# Altium PCB IMX6.PcbDoc (part 2 of 3)
Units mil, origin at the board's own origin, x right, y up, seen from the top; angles counter-clockwise.
Board outline 7950 x 5550 mil, 4 copper layers (Top Layer, GND, VCC, Bottom Layer), stack 30.634 mil thick; 256 components, 328 nets, 1056 pads, 386 vias.
Unrouted connection lines stored in the file: 1.
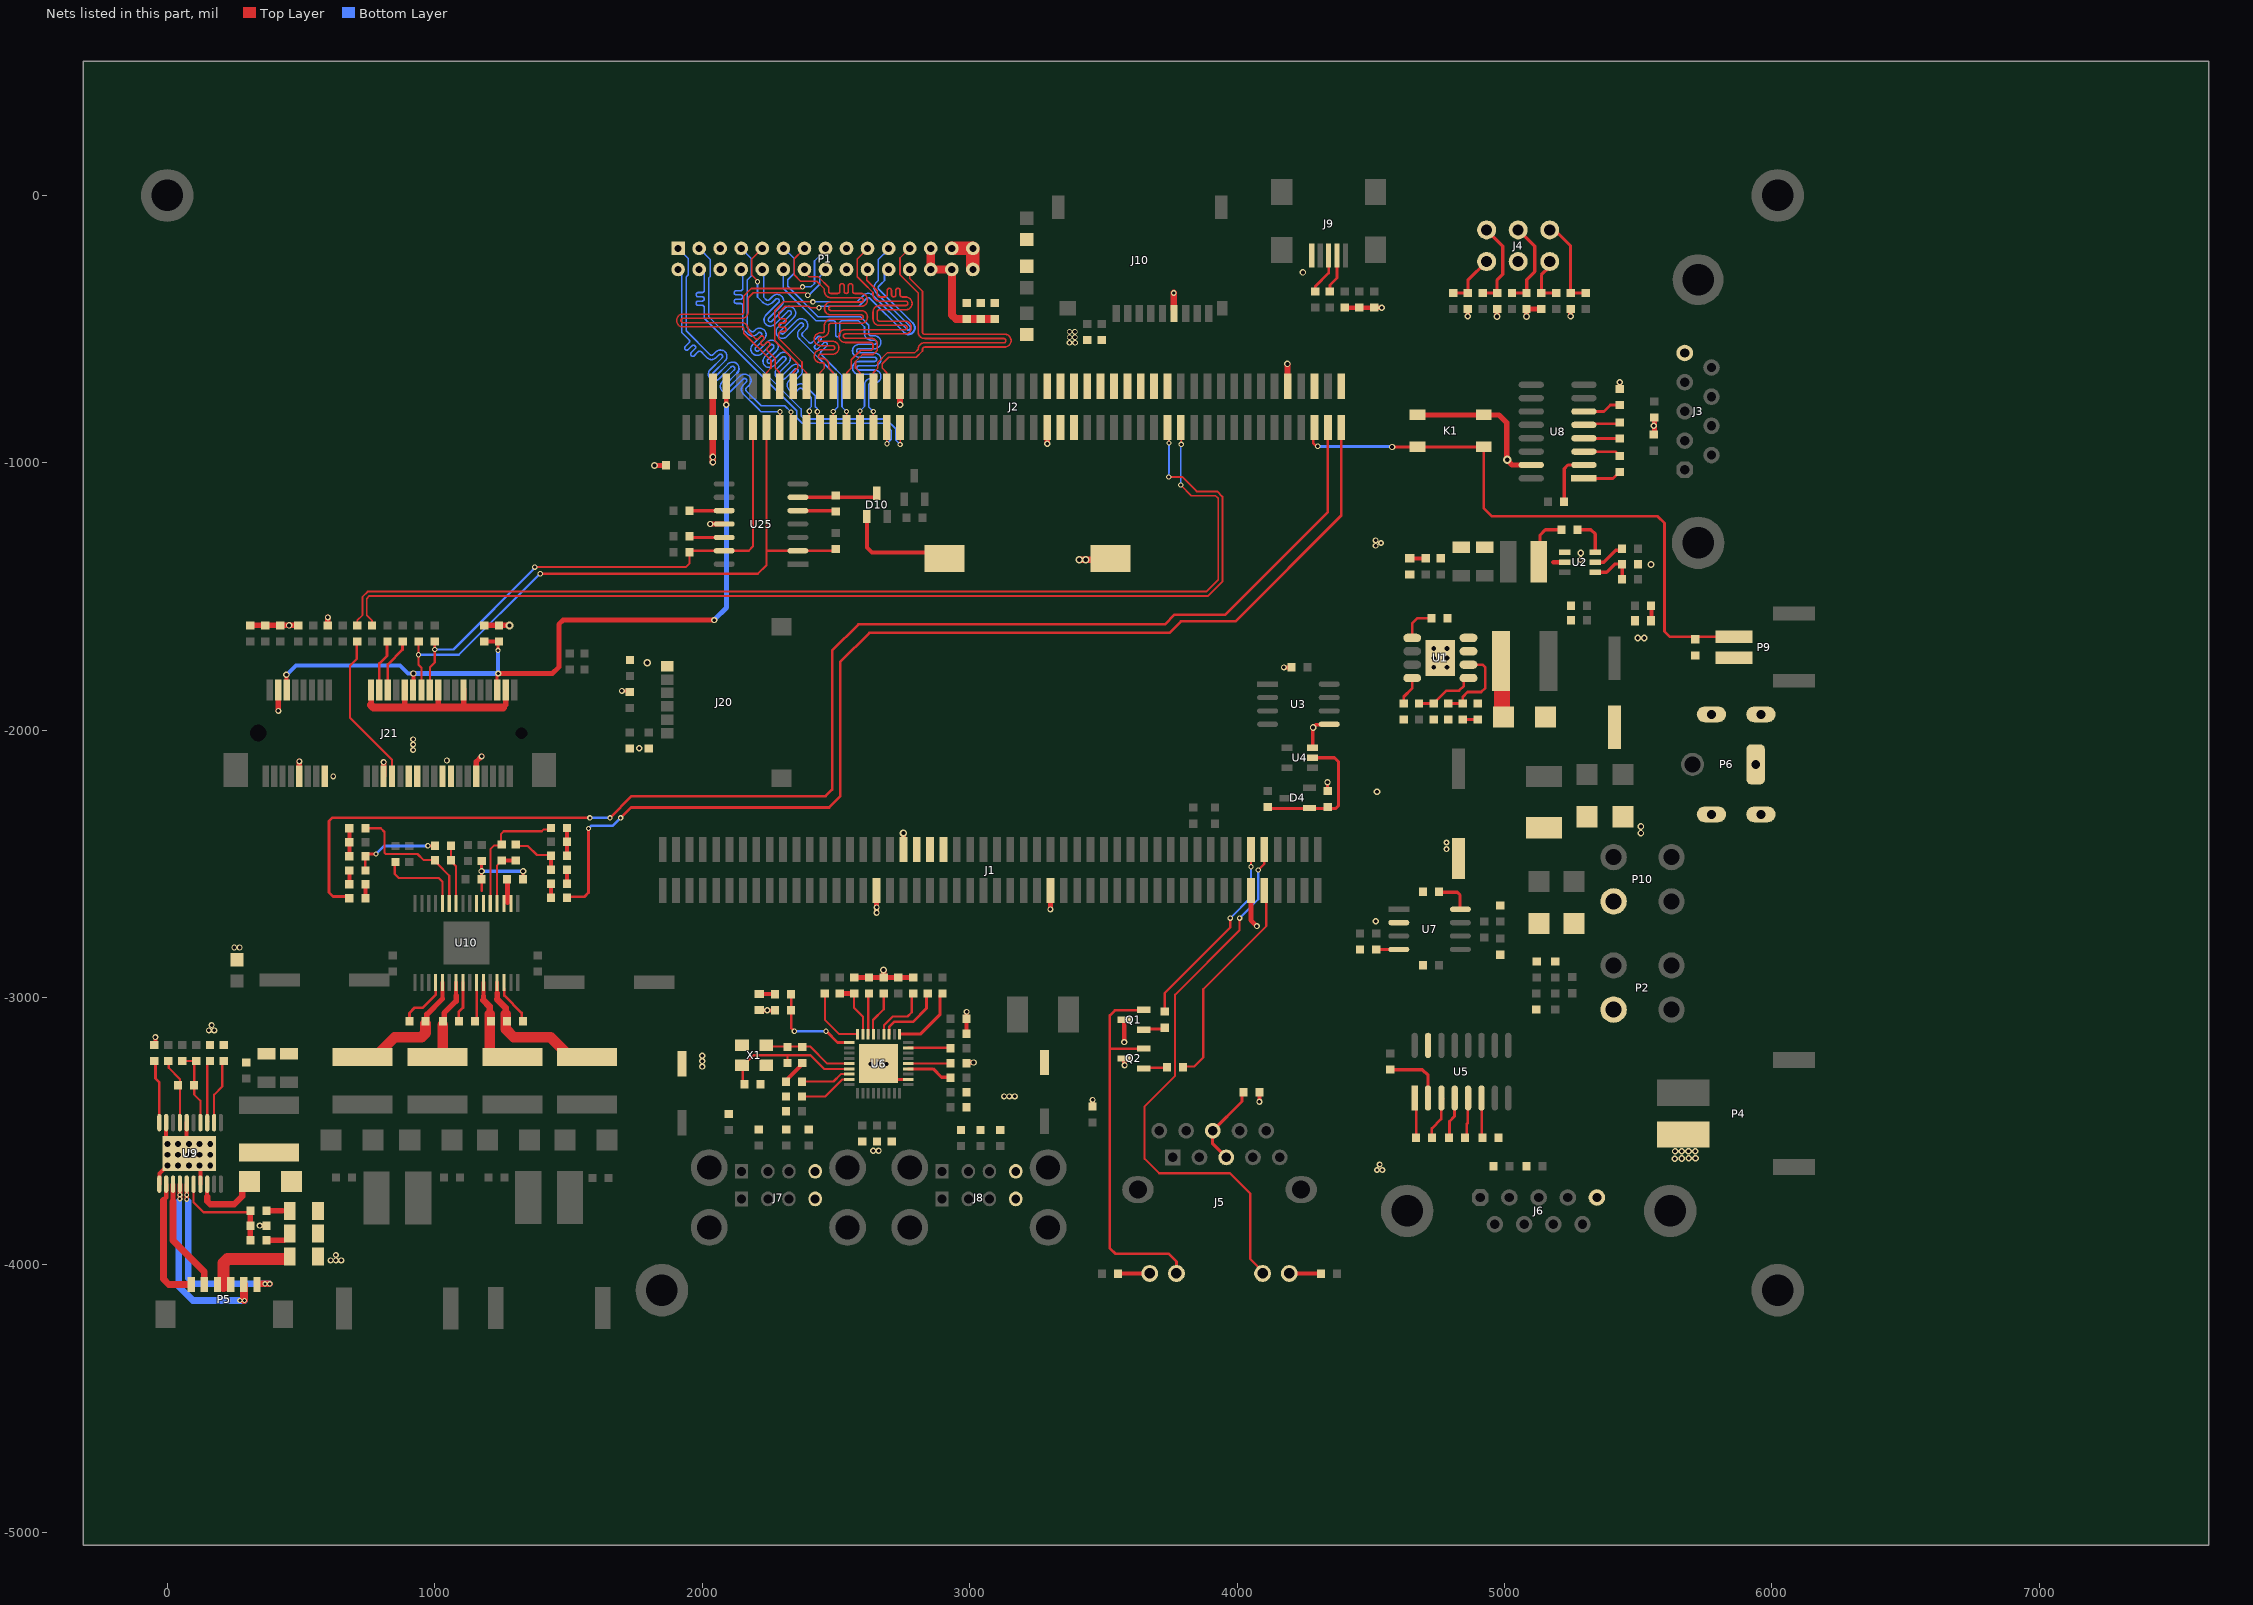
[diagram p4: the nets of this part, all layers, seen from the top]

## Via types
v1: diameter 20, hole 12, Top Layer to Bottom Layer, 137 vias
v2: diameter 22, hole 14, Top Layer to Bottom Layer, 44 vias
v3: diameter 23, hole 13, Top Layer to Bottom Layer, 35 vias
v4: diameter 24, hole 14, Top Layer to Bottom Layer, 34 vias
v5: diameter 25, hole 14, Top Layer to Bottom Layer, 26 vias
v6: diameter 22, hole 13, Top Layer to Bottom Layer, 22 vias
v7: diameter 22, hole 12, Top Layer to Bottom Layer, 19 vias
v8: diameter 30, hole 22, Top Layer to Bottom Layer, tented top, 15 vias
v9: diameter 25, hole 15, Top Layer to Bottom Layer, 11 vias
v10: diameter 22, hole 18, Top Layer to Bottom Layer, 6 vias
v11: diameter 25, hole 16, Top Layer to Bottom Layer, 5 vias
v12: diameter 24, hole 13, Top Layer to Bottom Layer, 5 vias
v13: diameter 20, hole 15, Top Layer to Bottom Layer, 5 vias
v14: diameter 26, hole 15, Top Layer to Bottom Layer, 4 vias
v15: diameter 18, hole 10, Top Layer to Bottom Layer, 4 vias
v16: diameter 20, hole 14, Top Layer to Bottom Layer, 4 vias
v17: diameter 28, hole 16, Top Layer to Bottom Layer, 3 vias
v18: diameter 28, hole 15, Top Layer to Bottom Layer, 2 vias
v19: diameter 30, hole 15, Top Layer to Bottom Layer, 2 vias
v20: diameter 32, hole 16, Top Layer to Bottom Layer, 1 vias
v21: diameter 26, hole 14, Top Layer to Bottom Layer, 1 vias
v22: diameter 30, hole 16, Top Layer to Bottom Layer, 1 vias

## Nets (pads, with @x,y where several pads share a name; then routed paths per layer and width w, separated by ;. In a path a pad name is that pad's centre, name@x,y a point inside that pad or via, vN(x,y) a via of type N, cw(c..) or ccw(c..) an arc to the next point about the centre after c; other vN are vias at no path point) (continued)
GND: BT1.2 C1.2 C2.2 C3.2 C5.2 C8.2 C10.1 C12.2 C13.1 C14.1 C17.2 C18.2 C19.2 C22.1 C23.2 C27.2 C29.2 C30.1 C31.1 C32.1 C34.1 C35.1 C36.2 C37.1 C38.1 C39.1 C40.1 C41.1 C42.1 C43.1 C44.1 C45.1 C46.1 C47.1 C48.1 C49.1 C50.1 C52.2 C53.1 C54.1 C55.2 C57.2 C58.1 C59.1 C60.1 C61.1 C62.1 C64.1 C86.2 C87.2 C88.2 C109.2 C110.2 C111.2 C112.2 C113.2 D1.A D3.K D5.K D6.1 D7.A D8.K D16.1 D17.1 D18.2 D19.2 D20.2 D21.2 D22.2 D23.1 D24.2 D25.1 D26.2 D27.1 D28.2 D29.1 D30.1 D31.2 D32.2 D33.1 D34.1 D35.1 D36.1 D37.1 DW1.A DW2.A J1.33 J1.38 J1.59 J1.89 J2.5 J2.6 J2.34 J2.55 J2.92 J3.5 J4.5 J6.5 J7.4 J7.8 J8.4 J8.8 J9.5 J10.6 J20.1 J21.4 J21.9 J21.15 J21.18 J21.21 J21.26 J21.27 J21.29 J21.34 J21.35 J21.37 J21.40 J21.43 J21.50 K1.1 K1.2 L2.1 L3.1 P1.5 P1.6 P1.17 P1.18 P1.25 P1.26 P1.28 P2.2 P4.2 P6.1 P9.2 P10.2 Q1.3 Q2.3 R1.1 R5.1 R8.1 R12.1 R15.2 R25.2 R26.2 R27.2 R28.1 R30.2 R37.1 R39.1 R43.2 R59.1 R87.1 R88.1 U1.7 U1.9 U2.1 U3.5 U4.3 U5.15 U6.11 U6.37 U7.2 U8.15 U9.6 U9.9 U9.11 U9.17 U9.21 U25.11 X1.2 X1.4 | length 5293.8
  Top Layer w10: C22.1@4338.48,-2227 v4(4338.48,-2195)
  Top Layer w12: v3(1699.48,-1853) 1732.19,-1853 1732.28,-1852.91 D32.2@1728.57,-1852.91 ; U6.37@2718.54,-3306.15 U6.11@2769.72,-3306.15 ; U4.3@4282.71,-2065.6 4283.48,-2064.83 4283.48,-1990 4293.48,-1980 U3.5@4343.48,-1980
  Top Layer w15: R43.2@-45.52,-3178 v3(-45.52,-3148) ; U9.11@-30.83,-3698 -30.83,-3658.32 U9.21@-15.52,-3643 ; U9.21@-5.24,-3528 U9.9@-5.24,-3468 ; U9.21@71.53,-3573.16 U9.6@71.53,-3468 ; U9.17@122.71,-3698 U9.21@122.71,-3624.34 ; v3(344.48,-3853) R37.1@369.48,-3853 ; D5.K@2207.48,-3048 R30.2@2271.48,-3048 ; C45.1@2322.48,-3301 2373.48,-3250 C39.1@2373.48,-3245 ; C35.1@2988.48,-3135 v6(2988.48,-3053) ; v3(4083.48,-3390) C19.2@4083.48,-3355 ; v6(4175.48,-1765) C23.2@4203.48,-1765
  Top Layer w18: v5(1821.48,-1010) C2.2@1869.8,-1010 ; v4(2029.48,-1229) U25.11@2081.89,-1229 ; C31.1@2561.48,-2925 C31.1@2568.48,-2925 R25.2@2623.48,-2925 R26.2@2678.48,-2925 C34.1@2733.48,-2925 R27.2@2785.48,-2925 ; v3(2652,-2683) J1.33@2652,-2580 ; J1.38@2752,-2425.48 v18(2752,-2385) ; C46.1@2984.48,-3243 v4(3014.48,-3243) ; v3(3302,-2670.52) J1.59@3302,-2599.77 ; C37.1@3459.48,-3408 v3(3459.48,-3383) ; v3(3578.06,-3166.58) Q1.3@3578.06,-3083 ; v3(3579.48,-3253) Q2.3@3579.48,-3229.42 ; J1.89@4052,-2599.77 4052,-2710.52 v3(4074.48,-2733) ; C48.1@4402.48,-420 C49.1@4457.48,-420 C47.1@4512.48,-420 v5@4543.48,-420 ; v5(4862.57,-452) D37.1@4862.57,-424.91 ; v5(4972.57,-453) D6.1@4972.57,-424.91 ; v5(5082.57,-453) D35.1@5082.57,-424.91 D36.1@5137.57,-424.91 ; v5(5247.57,-452) D34.1@5247.57,-424.91 ; C55.2@5431.48,-724 v4(5431.48,-699) ; D18.2@5561,-895 D19.2@5561,-836.35
  Top Layer w20: C111.2@308.48,-1608 R87.1@489.48,-1608 ; v3(414.28,-1927.8) J21.4@414.28,-1846.58 ; J21.9@493.02,-2169.42 v6(493.02,-2116.54) ; R88.1@599.48,-1608 v6(599.48,-1578) ; 761.2,-1906.72 J21.18@761.2,-1849.58 ; J21.21@807.98,-2171.5 v6(807.98,-2119.42) ; 887.2,-1918.72 J21.26@887.2,-1858.58 ; 1012.2,-1916.72 J21.34@1012.2,-1856.58 ; 1107.2,-1906.72 J21.40@1107.2,-1846.58 ; J21.43@1154.44,-2169.42 1154.44,-2118.04 v6(1174.48,-2098) ; C112.2@1184.48,-1608 C113.2@1239.48,-1608 v19(1278.48,-1608) ; 1254.48,-1916 1264.48,-1906 J21.50@1264.48,-1846.78 ; R26.2@2678.48,-2925 v14(2678.48,-2897) ; v4(3289.8,-928.51) J2.55@3289.8,-867.49 ; K1.1@4674.46,-820.95 4979.43,-820.95 5008.48,-850 5008.48,-988 5028.57,-1008.09 U8.15@5100.39,-1008.09
  Top Layer w22: v4(2739.8,-782.69) J2.34@2739.8,-713.94 ; v4(4188.48,-630) 4188.48,-712.63 J2.92@4189.8,-713.94
  Top Layer w24: v4(2039.8,-998.31) J2.6@2039.8,-713.94 ; v17(3409.48,-1363) BT1.2@3522.51,-1363
  Top Layer w25: J10.6@3763.48,-425 v7(3763.48,-365)
  Top Layer w30: 761.2,-1906.72 770.48,-1916 1254.48,-1916 ; P1.25@2854.36,-198 P1.26@2854.36,-276.74 P1.28@2933.1,-276.74 2933.1,-446.62 2949.48,-463 C52.2@2989.48,-463 C53.1@3041.48,-463 C54.1@3094.48,-463 ; D7.A@5153.48,-1950 D7.A@5154.22,-1950
  other v2: 249.48,-2813 269.48,-2813 1044.48,-2113
  other v3: 609.48,-3983 629.48,-3983 649.48,-3983 629.48,-3963 2639.48,-3573 2659.48,-3573 3128.48,-3370 3148.48,-3370 3168.48,-3370 1999.48,-3258 1999.48,-3238 1999.48,-3218 154.48,-3123 174.48,-3123 164.48,-3103 2652,-2663
  other v4: 2242.48,-3048 1764.48,-2068 2039.8,-978 4246.48,-288
  other v5: 5637.48,-3603 5663.48,-3602 5689.48,-3601 5715,-3601 5638.48,-3575 5663.48,-3575 5688.48,-3575 5713.48,-3575 4518.48,-2715 4523.48,-2230 4284.48,-1990 5498.48,-1655 5523.48,-1655 5548.48,-1380 5285.48,-1362 5285.48,-1337 5559,-861 4541.48,-420
  other v6: 619.48,-2173
  other v7: 4523.48,-3645 4543.48,-3645 4533.48,-3625 4783.48,-2445 4783.48,-2420 918.48,-2074 918.48,-2054 918.48,-2034 4518.48,-1310 4538.48,-1300 4518.48,-1290 3373.48,-551 3394.48,-551
  other v8: -0.52,-3628 39.48,-3628 79.48,-3628 119.48,-3628 159.48,-3628 -0.52,-3588 39.48,-3588 79.48,-3588 119.48,-3588 159.48,-3588 -0.52,-3548 39.48,-3548 79.48,-3548 119.48,-3548 159.48,-3548
  other v9: 5510,-2385 5510,-2360 454.48,-1608
  other v10: 4735.48,-1765 4785.48,-1765 4735.48,-1730 4785.48,-1730 4735.48,-1695 4785.48,-1695
  other v14: 2629.48,-3248 2689.48,-3248 2659.48,-3247.09
  other v16: 3373.48,-530 3393.48,-530 3373.48,-510 3393.48,-510
  other v17: 1794.48,-1748 3434.48,-1363
  other v20: 5010.48,-989
GPIO3_IO10: J1.44
GPIO3_IO12: J1.42
GPIO3_IO14: J1.40
GVDD: C73.2 R45.1 R49.2 U10.6 U10.7 | length 289
  Top Layer w10: 1174.48,-2600.95 R49.2@1174.48,-2568 ; R49.2@1175.43,-2557.96 R49.2@1175.48,-2559
  Top Layer w12: R49.2@1174.48,-2558 C73.2@1174.48,-2488 ; R45.1@1329.48,-2558 v4(1329.48,-2528)
  Bottom Layer w12: v4(1174.48,-2528) v4(1329.48,-2528)
HDMI_CEC: J2.59
HDMI_CLK_N: J2.72
HDMI_CLK_P: J2.74
HDMI_D0_N: J2.62
HDMI_D0_P: J2.60
HDMI_D1_N: J2.68
HDMI_D1_P: J2.70
HDMI_D2_N: J2.64
HDMI_D2_P: J2.66
HDMI_HPD: J2.57
HDMI_TX_DDC_SCL: J2.58
HDMI_TX_DDC_SDA: J2.56
HPL: C78.1 J2.97 | length 5188.9
  Top Layer w10: C78.1@682.48,-2622 618.48,-2622 603.48,-2607 603.48,-2340 615.48,-2328 v1(1579.48,-2328) ; v1(1654.48,-2328) 1735.48,-2247 2460.48,-2247 2485.48,-2222 2485.48,-1702 2583.48,-1604 3730.48,-1604 3766.48,-1568 3956.48,-1568 4339.8,-1184.69 J2.97@4339.8,-867.49
  Bottom Layer w10: v1(1579.48,-2328) v1(1654.48,-2328)
HPR: C85.1 J2.99 | length 4211.3
  Top Layer w10: C85.1@1495.48,-2623 1559.48,-2623 1574.48,-2608 v1(1574.48,-2368) ; v1(1694.48,-2328) 1733.48,-2289 2474.48,-2289 2516.48,-2247 2516.48,-1744 2624.48,-1636 3747.48,-1636 3790.48,-1593 3993.48,-1593 4389.8,-1196.69 J2.99@4389.8,-905.72
  Bottom Layer w10: v1(1574.48,-2368) 1584.48,-2358 1664.48,-2358 v1(1694.48,-2328)
I2C3_SCL: J2.13 J21.30 R90.2 R112.1 U25.2 | length 2391
  Top Layer w8: R90.2@938.48,-1669 938.48,-1755 949.72,-1766.24 J21.30@949.72,-1846.58 ; v1(1393.48,-1415) 2207.48,-1415 2239.8,-1382.69 J2.13@2239.8,-867.49 ; 2239.8,-1329 R112.1@2493.48,-1329
  Bottom Layer w8: v1(938.48,-1718) 1089.48,-1718 v1@1392.98,-1414.5
I2C3_SDA: J2.11 J21.32 R89.2 R113.1 U25.13 | length 2001.6
  Top Layer w8: J21.32@981.21,-1846.58 981.21,-1765.27 999.48,-1747 R89.2@999.48,-1667 ; v1@1378.48,-1390 1938.48,-1390 1952.48,-1376 R113.1@1952.48,-1334 ; R113.1@1957.48,-1329 U25.13@2081.89,-1329 2173.48,-1329 2189.8,-1312.69 J2.11@2189.8,-867.49
  Bottom Layer w8: v1(999.48,-1698) 1069.48,-1698 v1@1379.48,-1388
  other v1: 1373.48,-1390
LED_ACT: J1.92 J5.13 | length 2092.6
  Top Layer w8: v1(4009.48,-2703) 4009.48,-2748 3768.48,-2989 3768.48,-3293 3654.48,-3407 3654.48,-3603 3708.48,-3657 3973.48,-3657 4049.48,-3733 4049.48,-3978 J5.13@4089.48,-4018 ; v1(4079.48,-2523) 4102,-2500.48 J1.92@4102,-2446.23
  Bottom Layer w8: v1(4009.48,-2703) 4079.48,-2633 v1(4079.48,-2523)
LED_LINK10_100: J1.91 R14.2 | length 818.2
  Top Layer w8: R14.2@3794.48,-3258 3839.48,-3258 3873.48,-3224 3873.48,-2969 4109.48,-2733 4109.48,-2607.25 J1.91@4102,-2599.77
LED_LINK1000: J1.90 R13.2 | length 740.4
  Top Layer w8: R13.2@3729.48,-3053 3729.48,-2983 3974.48,-2738 v1(3974.48,-2703) ; v1(4052,-2510.48) J1.90@4052,-2446.23
  Bottom Layer w8: v1(3974.48,-2703) 4052,-2625.48 v1(4052,-2510.48)
LVDS0_CLK_N: J2.14 P1.15 | length 1285.2
  Top Layer w6: 2183.48,-348.37 2155.48,-376.37 2155.48,-435.69 cw(c2147.48,-435.69) 2147.48,-443.69 1927.84,-443.69 ccw(c1927.84,-467.69) 1927.84,-491.69 2147.48,-491.69 cw(c2147.48,-499.69) 2155.48,-499.69 2155.48,-515 2256.8,-616.31 2256.8,-645.7 2239.8,-662.7 J2.14@2239.8,-713.94 ; 2183.48,-348 2368.48,-348 v1(2374.48,-342)
  Bottom Layer w6: v1(2374.48,-342) 2406.85,-342 2419.48,-329.37 2419.48,-245 P1.15@2458.48,-206
LVDS0_CLK_P: J2.16 P1.16 | length 1267.4
  Top Layer w6: J2.16@2289.8,-713.94 2289.8,-662.7 2272.8,-645.7 2272.8,-609.69 2244.79,-581.69 2243.55,-580.44 cw(c2249.21,-574.78) 2243.55,-569.13 2250.89,-561.79 ccw(c2245.23,-556.13) 2250.89,-550.47 ccw(c2245.23,-556.13) 2239.58,-550.47 2232.24,-557.81 cw(c2226.58,-552.16) 2220.92,-557.81 cw(c2226.58,-552.16) 2220.92,-546.5 2228.26,-539.16 ccw(c2222.61,-533.5) 2228.26,-527.85 ccw(c2222.61,-533.5) 2216.95,-527.85 2209.61,-535.19 cw(c2203.95,-529.53) 2198.29,-535.19 2171.48,-508.37 2171.48,-499.69 ccw(c2147.48,-499.69) 2147.48,-475.69 1927.84,-475.69 cw(c1927.84,-467.69) 1927.84,-459.69 2147.48,-459.69 ccw(c2147.48,-435.69) 2171.48,-435.69 2171.48,-383 2190.11,-364.37 2385.85,-364.37 v1(2394.48,-373)
  Bottom Layer w6: v1(2394.48,-373) 2398.48,-373 2439.48,-332 2439.48,-303.63 P1.16@2445.79,-297.31
LVDS0_TX0_N: J2.30 P1.23 | length 1315.5
  Top Layer w6: J2.30@2639.8,-713.94 2639.8,-662.7 2656.8,-645.7 2656.8,-623.37 2691.17,-589 2793.48,-589 2807.48,-575 cw(c2831.48,-575) 2831.48,-551 ; P1.23@2775.62,-198 2739.48,-234.14 2739.48,-297 2764.31,-321.83 2807.48,-365 2807.48,-511 ccw(c2831.48,-511) 2831.48,-535 3126.98,-535 ; 2832.48,-551 3127.48,-551 ccw(c3127.48,-543) 3135.48,-543 ccw(c3127.48,-543) 3127.48,-535
LVDS0_TX0_P: J2.32 P1.24 | length 1220.3
  Top Layer w6: J2.32@2689.8,-713.94 2689.8,-662.7 2672.8,-645.7 2672.8,-630 2697.8,-605 2800.11,-605 2823.48,-581.63 ; P1.24@2775.62,-276.74 2775.62,-310.51 2823.48,-358.37 2823.48,-511 ccw(c2831.48,-511) 2831.48,-519 3129.98,-519 ; 2823.48,-581 2823.48,-575 cw(c2831.48,-575) 2831.48,-567 3130.98,-567 ccw(c3130.98,-543) 3154.98,-543 ccw(c3130.98,-543) 3130.98,-519
LVDS0_TX1_N: J2.18 P1.21 | length 1288.4
  Top Layer w6: J2.18@2339.8,-713.94 2339.8,-662.7 2356.8,-645.7 2356.8,-629.31 2270.48,-543 2270.48,-431.37 2303.85,-398 2379.48,-398 v1(2413.48,-398)
  Bottom Layer w6: v1(2413.48,-398) 2442.48,-398 2578.85,-398 2603.74,-373.11 cw(c2620.71,-390.08) 2637.68,-373.11 2765.33,-500.76 ; P1.21@2695.48,-203 2657.48,-241 2657.48,-319.37 2648.99,-327.86 ccw(c2665.97,-344.83) 2648.99,-361.8 2776.64,-489.44
  Bottom Layer w8: 2765.33,-500.76 ccw(c2770.98,-495.1) 2776.62,-500.78 ; 2776.64,-500.76 ccw(c2770.98,-495.1) 2778.98,-495.1 ccw(c2770.98,-495.1) 2776.64,-489.44
LVDS0_TX1_P: J2.20 P1.22 | length 1275.4
  Top Layer w6: J2.20@2389.8,-713.94 2389.8,-662.7 2372.8,-645.7 2372.8,-622.69 2286.48,-536.37 2286.48,-517 cw(c2294.48,-517) 2294.48,-509 2305.44,-509 ccw(c2305.44,-501) 2313.44,-501 ccw(c2305.44,-501) 2305.44,-493 2294.48,-493 cw(c2294.48,-485) 2286.48,-485 cw(c2294.48,-485) 2294.48,-477 2305.44,-477 ccw(c2305.44,-469) 2313.44,-469 ccw(c2305.44,-469) 2305.44,-461 2294.48,-461 cw(c2294.48,-453) 2286.48,-453 2286.48,-438 2310.48,-414 2398.37,-414 2404.37,-420 v1(2436.48,-420)
  Bottom Layer w6: v1(2436.48,-420) 2442.48,-414 2585.48,-414 2615.05,-384.43 cw(c2620.71,-390.08) 2626.37,-384.43 2754.01,-512.07 ; P1.22@2681.48,-289 2681.48,-318 2668.79,-330.69 2660.31,-339.17 ccw(c2665.97,-344.83) 2660.31,-350.49 2787.95,-478.13
  Bottom Layer w8: 2754.01,-512.07 ccw(c2770.98,-495.1) 2794.98,-495.1 ccw(c2770.98,-495.1) 2787.95,-478.13
LVDS0_TX2_N: J2.26 P1.19 | length 1333.8
  Top Layer w6: J2.26@2539.8,-713.94 2539.8,-662.7 2556.8,-645.7 2556.8,-614.37 2592.17,-579 2632.48,-579 2638.48,-573 2638.48,-558 ccw(c2630.48,-558) 2630.48,-550 2534.94,-550 cw(c2534.94,-526) 2534.94,-502 2758.02,-502 ccw(c2758.02,-494) 2766.02,-494 ccw(c2758.02,-494) 2758.02,-486 2662.48,-486 cw(c2662.48,-462) 2638.48,-462 2638.48,-435.69 cw(c2662.48,-435.69) 2662.48,-411.69 2760.48,-411.69 ccw(c2760.48,-403.69) 2768.48,-403.69 ccw(c2760.48,-403.69) 2760.48,-395.69 2662.48,-395.69 cw(c2662.48,-371.69) 2638.48,-371.69 2638.48,-363 2603.48,-328 2579.48,-304 2579.48,-238 P1.19@2612.48,-205 ; P1.19@2603.48,-212.66 P1.19@2618.14,-198
LVDS0_TX2_P: J2.28 P1.20 | length 1278.5
  Top Layer w6: J2.28@2589.8,-674 2589.8,-662.7 2572.8,-645.7 2572.8,-621 2598.8,-595 2639.11,-595 2654.48,-579.63 2654.48,-558 ccw(c2630.48,-558) 2630.48,-534 2534.94,-534 cw(c2534.94,-526) 2534.94,-518 2758.02,-518 ccw(c2758.02,-494) 2782.02,-494 ccw(c2758.02,-494) 2758.02,-470 2662.48,-470 cw(c2662.48,-462) 2654.48,-462 2654.48,-435.69 cw(c2662.48,-435.69) 2662.48,-427.69 2760.48,-427.69 ccw(c2760.48,-403.69) 2784.48,-403.69 ccw(c2760.48,-403.69) 2760.48,-379.69 2755.48,-379.69 2747.48,-379.69 cw(c2747.48,-371.69) 2739.48,-371.69 2739.48,-355.28 ccw(c2731.48,-355.28) 2731.48,-347.28 ccw(c2731.48,-355.28) 2723.48,-355.28 2723.48,-371.69 cw(c2715.48,-371.69) 2715.48,-379.69 cw(c2715.48,-371.69) 2707.48,-371.69 2707.48,-355.28 ccw(c2699.48,-355.28) 2699.48,-347.28 ccw(c2699.48,-355.28) 2691.48,-355.28 2691.48,-371.69 cw(c2683.48,-371.69) 2683.48,-379.69 2662.48,-379.69 cw(c2662.48,-371.69) 2654.48,-371.69 2654.48,-356.37 2614.79,-316.69 P1.20@2614.79,-280.09
LVDS0_TX3_N: J2.22 P1.13 | length 1316.7
  Top Layer w6: P1.13@2378.48,-202 2343.48,-237 2343.48,-297 2367.17,-320.69 2398.79,-320.69 2427.54,-320.69 2456.8,-349.94 2456.8,-358.63 ccw(c2480.8,-358.63) 2480.8,-382.63 2593.8,-382.63 cw(c2593.8,-390.63) 2601.8,-390.63 cw(c2593.8,-390.63) 2593.8,-398.63 2480.8,-398.63 ccw(c2480.8,-422.63) 2480.8,-446.63 2593.8,-446.63 cw(c2593.8,-454.63) 2601.8,-454.63 cw(c2593.8,-454.63) 2593.8,-462.63 2480.8,-462.63 ccw(c2480.8,-486.63) 2456.8,-486.63 2456.8,-505.7 cw(c2448.8,-505.7) 2448.8,-513.7 2442.32,-513.7 ccw(c2442.32,-537.7) 2442.32,-561.7 2487.27,-561.7 cw(c2487.27,-569.7) 2495.27,-569.7 cw(c2487.27,-569.7) 2487.27,-577.7 2442.32,-577.7 ccw(c2442.32,-601.7) 2442.32,-625.7 2448.8,-625.7 cw(c2448.8,-633.7) 2456.8,-633.7 2456.8,-645.7 2439.8,-662.7 J2.22@2439.8,-713.94
LVDS0_TX3_P: J2.24 P1.14 | length 1304.6
  Top Layer w6: P1.14@2387.79,-293.69 2398.79,-304.69 2434.17,-304.69 2472.8,-343.31 2472.8,-358.63 ccw(c2480.8,-358.63) 2480.8,-366.63 2506.48,-366.63 ccw(c2506.48,-358.63) 2514.48,-358.63 2514.48,-337.65 cw(c2522.48,-337.65) 2522.48,-329.65 cw(c2522.48,-337.65) 2530.48,-337.65 2530.48,-358.63 ccw(c2538.48,-358.63) 2538.48,-366.63 ccw(c2538.48,-358.63) 2546.48,-358.63 2546.48,-337.65 cw(c2554.48,-337.65) 2554.48,-329.65 cw(c2554.48,-337.65) 2562.48,-337.65 2562.48,-358.63 ccw(c2570.48,-358.63) 2570.48,-366.63 2578.48,-366.63 2579.48,-366.63 2593.8,-366.63 cw(c2593.8,-390.63) 2617.8,-390.63 cw(c2593.8,-390.63) 2593.8,-414.63 2480.8,-414.63 ccw(c2480.8,-422.63) 2480.8,-430.63 2593.8,-430.63 cw(c2593.8,-454.63) 2617.8,-454.63 cw(c2593.8,-454.63) 2593.8,-478.63 2480.8,-478.63 ccw(c2480.8,-486.63) 2472.8,-486.63 2472.8,-505.7 cw(c2448.8,-505.7) 2448.8,-529.7 2442.32,-529.7 ccw(c2442.32,-537.7) 2442.32,-545.7 2487.27,-545.7 cw(c2487.27,-569.7) 2511.27,-569.7 cw(c2487.27,-569.7) 2487.27,-593.7 2442.32,-593.7 ccw(c2442.32,-601.7) 2442.32,-609.7 2448.8,-609.7 cw(c2448.8,-633.7) 2472.8,-633.7 2472.8,-645.7 2489.8,-662.7 J2.24@2489.8,-713.94
LVDS1_CLK_N: J2.33 P1.3 | length 1300.4
  Top Layer w6: v1(2739.8,-931.31) J2.33@2739.8,-867.49 2739.48,-867.17 J2.33@2744.48,-862.17
  Bottom Layer w6: P1.3@1988.22,-198 2029.48,-239.26 2029.48,-303 2023.48,-309 2023.48,-452.37 2369.48,-798.37 2369.48,-825 2380.48,-836 2686.77,-836 2723.14,-872.37 2723.14,-914.66 v1(2739.8,-931.31)
LVDS1_CLK_P: J2.31 P1.4 | length 1312.2
  Top Layer w6: J2.31@2689.48,-867.17 J2.31@2689.8,-867.49 ; v1(2690.48,-928.51) 2690.48,-846.17 J2.31@2694.48,-842.17
  Bottom Layer w6: P1.4@2007.48,-276 2007.48,-339 2007.48,-347 2007.48,-355 cw(c1999.48,-355) 1999.48,-363 1984.83,-363 ccw(c1984.83,-371) 1976.83,-371 ccw(c1984.83,-371) 1984.83,-379 1999.48,-379 cw(c1999.48,-387) 2007.48,-387 cw(c1999.48,-387) 1999.48,-395 1984.83,-395 ccw(c1984.83,-403) 1976.83,-403 ccw(c1984.83,-403) 1984.83,-411 1999.48,-411 cw(c1999.48,-419) 2007.48,-419 2007.48,-459 2353.48,-805 2353.48,-831.63 2373.85,-852 2680.14,-852 2707.14,-879 2707.14,-911.85 v1(2690.48,-928.51)
LVDS1_TX0_N: J2.29 P1.11 | length 1286.8
  Top Layer w6: J2.29@2639.8,-867.49 v1(2639.8,-808)
  Bottom Layer w6: P1.11@2308.48,-201 2343.48,-236 2343.48,-291 2319.18,-315.3 2319.18,-340.07 2432.11,-453 2590.48,-453 2622.8,-485.31 2622.8,-517 ccw(c2630.8,-517) 2630.8,-525 2644.06,-525 cw(c2644.06,-549) 2668.06,-549 cw(c2644.06,-549) 2644.06,-573 2585.53,-573 ccw(c2585.53,-581) 2585.53,-589 2644.06,-589 cw(c2644.06,-613) 2668.06,-613 cw(c2644.06,-613) 2644.06,-637 2585.53,-637 ccw(c2585.53,-645) 2585.53,-653 2644.06,-653 cw(c2644.06,-677) 2668.06,-677 cw(c2644.06,-677) 2644.06,-701 2630.8,-701 ccw(c2630.8,-709) 2622.8,-709 2622.8,-791 v1(2639.8,-808)
LVDS1_TX0_P: J2.27 P1.12 | length 1295.5
  Top Layer w6: J2.27@2589.48,-867.17 J2.27@2589.8,-867.49 v1(2589.8,-806) v1@2589.8,-803.69
  Bottom Layer w6: P1.12@2303.18,-276.74 2303.18,-315.3 2303.18,-346.7 2425.48,-469 2474.48,-469 2482.48,-469 2490.48,-469 cw(c2490.48,-477) 2498.48,-477 2498.48,-520.98 ccw(c2506.48,-520.98) 2506.48,-528.98 ccw(c2506.48,-520.98) 2514.48,-520.98 2514.48,-477 cw(c2522.48,-477) 2522.48,-469 2530.48,-469 2542.48,-469 2583.85,-469 2606.8,-491.94 2606.8,-517 ccw(c2630.8,-517) 2630.8,-541 2644.06,-541 cw(c2644.06,-549) 2652.06,-549 cw(c2644.06,-549) 2644.06,-557 2585.53,-557 ccw(c2585.53,-581) 2585.53,-605 2644.06,-605 cw(c2644.06,-613) 2652.06,-613 cw(c2644.06,-613) 2644.06,-621 2585.53,-621 ccw(c2585.53,-645) 2585.53,-669 2644.06,-669 cw(c2644.06,-677) 2652.06,-677 cw(c2644.06,-677) 2644.06,-685 2630.8,-685 ccw(c2630.8,-709) 2606.8,-709 2606.8,-789 v1(2589.8,-806)
LVDS1_TX1_N: J2.23 P1.9 | length 1243.2
  Top Layer w6: v1(2206.48,-323) 2206.48,-319 2185.48,-298 2185.48,-236.96 P1.9@2224.44,-198 ; v1(2489.48,-808) 2489.48,-867.17 J2.23@2489.8,-867.49
  Bottom Layer w6: v1(2206.48,-323) 2206.48,-366 2206.48,-380 2219.17,-392.69 2227.65,-401.17 ccw(c2244.62,-384.2) 2261.59,-401.17 2274.32,-388.44 cw(c2279.98,-394.1) 2285.63,-388.44 cw(c2279.98,-394.1) 2287.98,-394.1 cw(c2279.98,-394.1) 2285.63,-399.76 2237.56,-447.83 ; 2237.55,-447.84 ccw(c2254.52,-464.81) 2271.49,-481.78 ; 2271.5,-481.78 2319.57,-433.71 cw(c2325.23,-439.36) 2330.89,-433.7 ; 2330.91,-433.72 cw(c2325.23,-439.36) 2333.23,-439.36 cw(c2325.23,-439.36) 2330.9,-445.01 2282.81,-493.09 ccw(c2299.78,-510.07) 2316.75,-527.04 2364.83,-478.95 cw(c2370.49,-484.61) 2376.12,-478.93 cw(c2370.49,-484.61) 2378.49,-484.61 cw(c2370.49,-484.61) 2376.14,-490.27 2363.42,-503 ccw(c2380.39,-519.97) 2363.42,-536.94 2506.48,-680 2506.48,-791 v1(2489.48,-808)
LVDS1_TX1_P: J2.25 P1.10 | length 1298.1
  Top Layer w6: v1(2539.48,-808) 2539.48,-867.17 J2.25@2539.8,-867.49
  Bottom Layer w6: 2230.48,-367.37 P1.10@2230.48,-278 ; 2230.48,-360 2230.48,-381.37 2238.97,-389.86 ccw(c2244.62,-384.2) 2250.28,-389.86 2263.01,-377.13 cw(c2279.98,-394.1) 2303.98,-394.1 cw(c2279.98,-394.1) 2296.95,-411.07 2248.87,-459.15 ccw(c2254.52,-464.81) 2248.87,-470.47 ; 2248.89,-470.49 ccw(c2254.52,-464.81) 2260.16,-470.49 ; 2260.19,-470.46 2308.26,-422.38 cw(c2325.23,-439.36) 2349.23,-439.36 cw(c2325.23,-439.36) 2342.2,-456.33 2294.13,-504.4 ccw(c2299.78,-510.07) 2294.12,-515.72 ; 2294.14,-515.74 ccw(c2299.78,-510.07) 2305.41,-515.74 ; 2305.44,-515.72 2353.52,-467.64 cw(c2370.49,-484.61) 2394.49,-484.61 cw(c2370.49,-484.61) 2387.46,-501.58 2374.73,-514.31 ccw(c2380.39,-519.97) 2374.73,-525.62 2399.11,-550 ccw(c2404.76,-544.34) 2410.42,-550 2431.49,-528.93 cw(c2437.15,-534.59) 2442.8,-528.93 cw(c2437.15,-534.59) 2442.8,-540.25 2421.74,-561.31 ccw(c2427.39,-566.97) 2421.74,-572.63 ccw(c2427.39,-566.97) 2433.05,-572.63 2454.12,-551.56 cw(c2459.77,-557.22) 2465.43,-551.56 cw(c2459.77,-557.22) 2465.43,-562.87 2444.36,-583.94 ccw(c2450.02,-589.6) 2444.36,-595.25 2482.29,-633.19 2522.48,-673.37 2522.48,-791 v1(2539.48,-808)
LVDS1_TX2_N: J2.21 P1.7 | length 1287.1
  Top Layer w6: v1(2430.48,-809) 2430.48,-858.17 J2.21@2439.8,-867.49
  Bottom Layer w6: P1.7@2151.48,-204 2183.48,-236 2183.48,-301 2167.48,-317 2167.48,-493.37 2181.79,-507.69 ccw(c2187.45,-502.03) 2193.11,-507.69 2197.65,-503.14 cw(c2214.62,-520.11) 2238.62,-520.11 cw(c2214.62,-520.11) 2231.59,-537.08 2199.88,-568.79 ccw(c2205.53,-574.46) 2199.86,-580.09 ccw(c2205.53,-574.46) 2211.17,-580.13 ; 2211.2,-580.11 2242.91,-548.4 cw(c2259.88,-565.37) 2283.88,-565.37 cw(c2259.88,-565.37) 2276.85,-582.34 2245.14,-614.05 ccw(c2250.79,-619.71) 2245.11,-625.35 ccw(c2250.79,-619.71) 2256.43,-625.39 ; 2256.45,-625.36 2288.16,-593.65 cw(c2305.13,-610.62) 2329.13,-610.62 cw(c2305.13,-610.62) 2322.1,-627.59 2290.39,-659.31 ccw(c2296.04,-664.97) 2290.39,-670.62 ; 2290.41,-670.64 ccw(c2296.04,-664.97) 2301.7,-670.62 2333.42,-638.91 cw(c2350.39,-655.88) 2374.39,-655.88 cw(c2350.39,-655.88) 2367.36,-672.85 2335.65,-704.56 ccw(c2341.3,-710.22) 2335.62,-715.86 ; 2335.64,-715.88 ccw(c2341.3,-710.22) 2346.96,-715.88 2351.5,-711.33 cw(c2368.47,-728.3) 2385.44,-711.33 2422.8,-748.69 2422.8,-790.31 2430.48,-798 v1(2430.48,-809)
LVDS1_TX2_P: J2.19 P1.8 | length 1272
  Top Layer w6: J2.19@2389.8,-867.49 2400.48,-856.8 v1(2400.48,-807)
  Bottom Layer w6: P1.8@2151.48,-301 2151.48,-317 2151.48,-332 2151.48,-340 2151.48,-348 cw(c2143.48,-348) 2143.48,-356 2127.15,-356 ccw(c2127.15,-364) 2119.15,-364 ccw(c2127.15,-364) 2127.15,-372 2143.48,-372 cw(c2143.48,-380) 2151.48,-380 cw(c2143.48,-380) 2143.48,-388 2127.15,-388 ccw(c2127.15,-396) 2119.15,-396 ccw(c2127.15,-396) 2127.15,-404 2143.48,-404 cw(c2143.48,-412) 2151.48,-412 2151.48,-483 2151.48,-500 2170.48,-519 ccw(c2187.45,-502.03) 2204.42,-519 2208.96,-514.46 cw(c2214.62,-520.11) 2220.26,-514.44 cw(c2214.62,-520.11) 2222.62,-520.11 cw(c2214.62,-520.11) 2220.29,-525.76 ; 2220.27,-525.78 2188.57,-557.48 ccw(c2205.53,-574.46) 2222.5,-591.43 ; 2222.51,-591.42 2254.21,-559.72 cw(c2259.88,-565.37) 2265.53,-559.71 ; 2265.53,-571.03 2233.83,-602.73 ccw(c2250.79,-619.71) 2267.76,-636.68 ; 2265.54,-571.02 ccw(c2259.88,-565.37) 2267.88,-565.37 ccw(c2259.88,-565.37) 2265.55,-559.73 ; 2267.77,-636.67 2299.47,-604.97 cw(c2305.13,-610.62) 2310.79,-604.97 ; 2310.81,-604.99 cw(c2305.13,-610.62) 2313.13,-610.62 cw(c2305.13,-610.62) 2310.79,-616.28 2279.07,-648 ccw(c2296.04,-664.97) 2313.01,-681.94 2344.72,-650.23 ; 2344.73,-650.22 cw(c2350.39,-655.88) 2356.02,-650.2 cw(c2350.39,-655.88) 2358.39,-655.88 cw(c2350.39,-655.88) 2356.05,-661.53 2324.33,-693.24 ccw(c2341.3,-710.22) 2358.27,-727.19 2362.81,-722.65 cw(c2368.47,-728.3) 2374.13,-722.65 2406.8,-755.31 2406.8,-791 2400.48,-797.31 v1(2400.48,-807)
LVDS1_TX3_N: J2.17 P1.1 | length 1271.7
  Top Layer w6: v1(2331.48,-810) 2331.48,-855.8 2341.48,-865.8 J2.17@2339.8,-867.49 J2.17@2339.48,-867.17
  Bottom Layer w6: P1.1@1927.48,-216 1947.48,-236 1947.48,-297 1939.48,-305 1939.48,-506.37 2028.79,-595.69 ccw(c2034.45,-590.03) 2040.11,-595.69 2050.84,-584.95 cw(c2067.81,-601.93) 2091.81,-601.93 cw(c2067.81,-601.93) 2084.78,-618.9 2040.7,-662.98 ccw(c2046.35,-668.64) 2040.69,-674.3 ; 2040.71,-674.32 ccw(c2046.35,-668.64) 2051.98,-674.32 ; 2052.01,-674.29 2096.09,-630.21 cw(c2113.06,-647.18) 2137.06,-647.18 ; 2085.94,-719.55 cw(c2091.6,-713.9) 2085.94,-708.25 2130.04,-664.15 ; 2085.96,-719.57 ccw(c2091.6,-713.9) 2097.24,-719.57 ; 2097.27,-719.55 2141.35,-675.46 cw(c2158.32,-692.44) 2182.32,-692.44 cw(c2158.32,-692.44) 2175.29,-709.41 2164.56,-720.14 ccw(c2170.22,-725.79) 2164.56,-731.45 2220.11,-787 2308.48,-787 v1(2331.48,-810)
  Bottom Layer w8: 2130.04,-664.15 ccw(c2113.06,-647.18) 2137.06,-647.18
LVDS1_TX3_P: J2.15 P1.2 | length 1279.9
  Top Layer w6: J2.15@2289.8,-867.49 J2.15@2290.48,-866.8 ; v1(2290.48,-809) J2.15@2290.48,-866.8 ; J2.15@2296.48,-860.8 J2.15@2290.48,-866.8
  Bottom Layer w6: P1.2@1923.48,-295 1923.48,-513 1938.98,-528.5 1944.64,-534.16 1950.29,-539.81 cw(c1944.64,-545.47) 1950.29,-551.13 1936.27,-565.15 ccw(c1941.93,-570.81) 1936.27,-576.47 ccw(c1941.93,-570.81) 1947.58,-576.47 1961.61,-562.44 cw(c1967.26,-568.1) 1972.92,-562.44 cw(c1967.26,-568.1) 1972.92,-573.75 1958.9,-587.78 ccw(c1964.55,-593.44) 1958.9,-599.09 ccw(c1964.55,-593.44) 1970.21,-599.09 1984.24,-585.07 cw(c1989.89,-590.73) 1995.55,-585.07 2007.98,-597.5 2017.48,-607 ccw(c2034.45,-590.03) 2051.42,-607 2062.15,-596.27 cw(c2067.81,-601.93) 2073.45,-596.25 ; 2073.47,-596.27 cw(c2067.81,-601.93) 2075.81,-601.93 cw(c2067.81,-601.93) 2073.47,-607.58 2029.38,-651.67 ccw(c2046.35,-668.64) 2063.32,-685.61 2107.4,-641.53 ; 2074.63,-696.93 ccw(c2091.6,-713.9) 2108.57,-730.87 2152.66,-686.78 cw(c2158.32,-692.44) 2163.96,-686.76 ; 2074.64,-696.92 2118.71,-652.84 ccw(c2113.06,-647.18) 2121.06,-647.18 ccw(c2113.06,-647.18) 2118.74,-641.54 ; 2107.43,-641.5 cw(c2113.06,-647.18) 2118.72,-641.52 ; 2163.98,-686.78 cw(c2158.32,-692.44) 2166.32,-692.44 cw(c2158.32,-692.44) 2163.98,-698.09 2153.24,-708.82 ccw(c2170.22,-725.79) 2153.24,-742.76 2208.79,-798.31 2219.48,-809 v1(2290.48,-809)
MIC: J2.100
MINIPCIE1V5: C112.1 C113.1 J2.8 J21.6 J21.28 J21.48 | length 3040.6
  Top Layer w12: J21.28@918.22,-1846.58 J21.28@919.48,-1845.32 ; C112.1@1184.48,-1673 C112.1@1189.48,-1668 ; J21.48@1232.48,-1844 1232.48,-1791.5 v12(1235.98,-1788) v12@1244.48,-1788 ; v1(1235.98,-1701.5) 1235.98,-1671.5 C113.1@1239.48,-1668 ; J2.8@2089.48,-714.26 J2.8@2089.8,-713.94
  Top Layer w15: J21.6@444.48,-1845.28 v4(444.48,-1793) ; J21.28@919.48,-1845.32 v4(919.48,-1788) ; C112.1@1189.48,-1668 C113.1@1239.48,-1668
  Top Layer w18: v12@1244.48,-1788 1439.48,-1788 1463.48,-1764 1463.48,-1604 1479.48,-1588 v12(2044.48,-1588) ; v12(2089.48,-783) J2.8@2089.48,-714.26
  Bottom Layer w12: v4(919.48,-1788) v4@924.48,-1788
  Bottom Layer w15: v4(444.48,-1793) 479.48,-1758 869.48,-1758 899.48,-1788 v4(919.48,-1788) ; v12(1235.98,-1788) v1(1235.98,-1701.5)
  Bottom Layer w18: v4@924.48,-1788 v12(1235.98,-1788) ; v12@2046.98,-1585.5 2090.48,-1542 v12@2090.48,-783
NetBT1_1: BT1.1 D10.1 | length 395.3
  Top Layer w15: D10.1@2615.42,-1200.95 2615.42,-1315.94 2635.54,-1336.06 BT1.1@2887.4,-1336.06
NetC4_1: C4.1 D7.K L1.1 U1.8 | length 181.7
  Top Layer w60: D7.K@4991.74,-1945 L1.1@4991.74,-1763.26
NetC4_2: C4.2 U1.1 | length 133.4
  Top Layer w10: U1.1@4655.17,-1655 4655.17,-1601.32 4675.48,-1581 C4.2@4726.48,-1581
NetC6_1: C6.1 U8.1 | length 123.7
  Top Layer w10: 5406.48,-1059 C6.1@5431.48,-1034
  Top Layer w12: U8.1@5318.15,-1059 5406.48,-1059
NetC6_2: C6.2 U8.3 | length 140.8
  Top Layer w10: U8.3@5297.24,-958.09 5415.57,-958.09 C6.2@5431.48,-974
NetC7_1: C7.1 U8.2 | length 198.5
  Top Layer w12: C7.1@5223.48,-1141 5223.48,-1022 5237.39,-1008.09 U8.2@5297.24,-1008.09
NetC8_1: C8.1 U1.4 | length 108.1
  Top Layer w10: C8.1@4623.48,-1900 4623.48,-1875 4655.17,-1843.32 U1.4@4655.17,-1805
NetC9_1: C9.1 R5.2 | length 56
  Top Layer w10: C9.1@4844.48,-1960 R5.2@4900.48,-1960
NetC9_2: C9.2 C10.2 U1.6 | length 319.6
  Top Layer w10: C10.2@4790.48,-1900 C9.2@4844.48,-1900 4844.48,-1875 4862.48,-1857 4913,-1857 4928.48,-1841.52 4928.48,-1766 4917.48,-1755 U1.6@4865.8,-1755
NetC11_1: C11.1 L11.2 U2.2 | length 215.2
  Top Layer w12: L11.2@5133.48,-1350 5133.48,-1270 5153.48,-1250 C11.1@5218.48,-1250
  Top Layer w18: 5183.48,-1372 U2.2@5225.39,-1372
NetC11_2: C11.2 U2.6 | length 136.3
  Top Layer w12: C11.2@5278.48,-1250 5323.48,-1250 5339.57,-1266.09 U2.6@5339.57,-1334.6
NetC19_1: C19.1 J5.5 J5.6 | length 306.4
  Top Layer w12: J5.5@3909.48,-3498 4018.48,-3389 C19.1@4018.48,-3355 ; J5.5@3918.48,-3505 3908.48,-3515 3908.48,-3547 J5.6@3959.48,-3598
NetC22_2: C22.2 D4.1 R18.1 U4.2 | length 525.4
  Top Layer w12: R18.1@4119.48,-2293 4369.48,-2293 4379.48,-2283 4379.48,-2118 4364.48,-2103 U4.2@4289.48,-2103
NetC24_1: C24.1 U5.1 | length 140.2
  Top Layer w10: C24.1@4670.39,-3518.91 U5.1@4670.39,-3378.76
NetC24_2: C24.2 U5.3 | length 155.6
  Top Layer w10: C24.2@4728.48,-3517 4728.48,-3489 4763.48,-3454 4763.48,-3385.67 U5.3@4770.39,-3378.76
NetC25_1: C25.1 U5.2 | length 236.5
  Top Layer w12: C25.1@4573.48,-3265 4578.48,-3270 4693.48,-3270 4714.39,-3290.91 U5.2@4714.39,-3375.76
NetC27_1: C27.1 U5.6 | length 145.2
  Top Layer w10: C27.1@4915.39,-3523.91 U5.6@4915.39,-3378.76
NetC28_1: C28.1 U5.4 | length 162.1
  Top Layer w10: C28.1@4799.48,-3528 4794.43,-3522.95 4794.43,-3463.06 4813.48,-3444 4813.48,-3385.67 U5.4@4820.39,-3378.76
NetC28_2: C28.2 U5.5 | length 153.8
  Top Layer w10: C28.2@4859.48,-3528 4859.48,-3473 4863.48,-3469 4863.48,-3385.67 U5.5@4870.39,-3378.76
NetC31_2: C31.2 R24.2 U6.26 | length 215.5
  Top Layer w8: C31.2@2567.48,-2987 2567.48,-3038 2600.43,-3070.95 U6.26@2600.43,-3136.86
  Top Layer w18: R24.2@2513.48,-2985 C31.2@2565.48,-2985
NetC38_2: C38.2 R31.1 U6.33 X1.1 | length 506
  Top Layer w8: X1.1@2164.48,-3243 2191.48,-3216 2318.48,-3216 ; R31.1@2318.48,-3245 2318.48,-3216 ; U6.33@2549.24,-3266.78 2455.26,-3266.78 2404.48,-3216 2318.48,-3216
  Top Layer w10: C38.2@2151.48,-3323 X1.1@2151.48,-3263
NetC39_2: C39.2 R31.2 U6.32 X1.3 | length 331.3
  Top Layer w8: X1.3@2244.48,-3183 2403.48,-3183 2467.57,-3247.09 U6.32@2549.24,-3247.09
NetC45_2: C45.2 U6.34 | length 184.2
  Top Layer w8: C45.2@2376.48,-3314 2490.63,-3314 2518.16,-3286.46 U6.34@2549.24,-3286.46
NetC46_2: C46.2 U6.14 | length 164.2
  Top Layer w8: U6.14@2769.72,-3247.09 C46.2@2933.89,-3247.09
NetC52_1: C52.1 C53.2 C54.2 L4.2 L5.1 P1.27 P1.29 P1.30 | length 157.5
  Top Layer w50: P1.27@2933.1,-198 P1.29@3011.84,-198 P1.30@3011.84,-276.74
NetC55_1: C55.1 U8.6 | length 144.2
  Top Layer w10: U8.6@5297.24,-808.09 5372.39,-808.09 5396.48,-784 C55.1@5431.48,-784
NetC56_1: C56.1 U8.4 | length 134.6
  Top Layer w10: U8.4@5297.24,-908.09 5298.15,-909 C56.1@5431.48,-909
NetC56_2: C56.2 U8.5 | length 125.2
  Top Layer w10: U8.5@5311.32,-854 C56.2@5436.48,-854
NetC60_2: C60.2 C61.2 C62.2 C63.2 D11.K P5.3 P5.4 R38.2 | length 457.2
  Top Layer w20: C63.2@369.48,-3908 434.48,-3908 ; R38.2@379.48,-3798 429.48,-3798
  Top Layer w40: C60.2@446.33,-3978 C60.2@456.33,-3968
  Top Layer w45: 209.48,-4078 209.48,-3993 224.48,-3978 C60.2@446.33,-3978
NetC63_1: C63.1 R37.2 R38.1 U9.16 | length 422.5
  Top Layer w8: U9.16@97.12,-3698 97.12,-3765.64 134.48,-3803 314.48,-3803 R38.1@319.48,-3808
  Top Layer w20: C63.1@309.48,-3908 R38.1@309.48,-3793
NetC64_2: C64.2 U9.2 | length 242.7
  Top Layer w8: U9.2@173.89,-3468 173.89,-3363.59 204.48,-3333 C64.2@204.48,-3238
NetC67_1: C67.1 R47.1 RS1.1 | length 197.1
  Top Layer w8: C67.1@1300.48,-2433 1347.48,-2433 1381.48,-2467 RS1.1@1435.48,-2467
  Top Layer w15: R47.1@1434.48,-2516 RS1.1@1434.48,-2468
NetC67_2: C67.2 C69.1 U10.4 | length 211.4
  Top Layer w8: U10.4@1232.71,-2648 1232.71,-2505.77 C69.1@1250.48,-2488
  Top Layer w15: C69.1@1249.48,-2488 1250.48,-2488 C67.2@1293.48,-2488
NetC68_1: C68.1 U10.30 | length 151.9
  Top Layer w10: U10.30@1259.48,-2968 1259.48,-2993 1324.48,-3058 C68.1@1324.48,-3093
NetC68_2: C68.2 L7.1 U10.29 | length 536.4
  Top Layer w15: 1232.71,-2983.37 U10.29@1232.71,-2943.28
  Top Layer w20: 1232.71,-3006.23 1232.71,-2983.37
  Top Layer w25: 1232.71,-3006.23 1264.48,-3038 1264.48,-3063
  Top Layer w40: 1264.48,-3063 1264.48,-3118 1294.48,-3148 1432,-3148 1507,-3223 L7.1@1569.48,-3223
NetC69_2: C69.2 C71.2 U10.5 | length 492.8
  Top Layer w8: U10.5@1207.12,-2648 1207.12,-2445.36 1220.48,-2432 C69.2@1253.48,-2432 ; C69.2@1247.48,-2431 1247.48,-2388 1257.48,-2378 1399.48,-2378 1405.48,-2372 1430.48,-2372 C71.2@1434.48,-2368
NetC71_1: C71.1 R48.1 RS1.2 | length 108
  Top Layer w10: RS1.2@1494.48,-2476 RS1.2@1494.48,-2468
  Top Layer w15: RS1.2@1494.48,-2468 R48.1@1494.48,-2418 C71.1@1494.48,-2368
NetC74_1: C74.1 U10.26 | length 133.3
  Top Layer w10: C74.1@1155.94,-3076.54 U10.26@1155.94,-2943.28
NetC74_2: C74.2 L8.1 U10.27 | length 269.2
  Top Layer w15: 1181.53,-2994.21 U10.27@1181.53,-2943.28
  Top Layer w20: 1181.53,-3010.05 1181.53,-2994.21
  Top Layer w25: 1181.53,-3010.05 1204.48,-3033 1204.48,-3063
  Top Layer w40: L8.1@1204.48,-3203 1204.48,-3063
NetC75_1: C75.1 U10.24 | length 151.1
  Top Layer w10: C75.1@1089.48,-3088 1089.48,-3053 1104.76,-3037.72 U10.24@1104.76,-2943.28
NetC75_2: C75.2 L9.1 U10.23 | length 291.5
  Top Layer w8: L9.1@1009.48,-3223 L9.1@1029.48,-3203
  Top Layer w15: 1079.17,-2993.31 U10.23@1079.17,-2943.28
  Top Layer w20: C75.2@1034.48,-3088 1034.48,-3058 1079.17,-3013.32 1079.17,-2993.31
  Top Layer w40: L9.1@1029.48,-3203 C75.2@1029.48,-3103
NetC77_1: C77.1 R52.1 RS2.1 | length 326.9
  Top Layer w10: R52.1@739.48,-2513 739.48,-2468 744.48,-2463 v1(779.48,-2463) ; v1@973.48,-2433 1005.48,-2433 C77.1@1006.48,-2434
  Bottom Layer w10: v1(779.48,-2463) 809.48,-2433 v1@973.48,-2433
  other v1: 973.48,-2432
NetC77_2: C77.2 C79.1 U10.10 | length 227.7
  Top Layer w8: C79.1@1060.48,-2497 C77.2@1060.48,-2427 ; C79.1@1065.48,-2496 1079.17,-2509.69 U10.10@1079.17,-2648
NetC78_2: C78.2 R51.1 | length 49
  Top Layer w15: C78.2@739.48,-2622 R51.1@739.48,-2573
NetC79_2: C79.2 C81.2 U10.11 | length 522.3
  Top Layer w8: C81.2@744.98,-2374.5 752.48,-2367 797.48,-2367 811.36,-2380.88 811.36,-2457.88 816.48,-2463 934.48,-2463 957.48,-2486 996.48,-2486 C79.2@999.48,-2489 ; C79.2@1007.48,-2498 1053.57,-2544.09 U10.11@1053.57,-2648
NetC81_1: C81.1 R53.1 RS2.2 | length 104
  Top Layer w15: RS2.2@679.48,-2477 679.48,-2473 679.48,-2423 C81.1@679.48,-2373
NetC82_1: C82.1 U10.20 | length 202.9
  Top Layer w10: C82.1@904.48,-3088 904.48,-3058 924.48,-3038 954.48,-3038 1002.39,-2990.09 U10.20@1002.39,-2943.28
NetC82_2: C82.2 L10.1 U10.21 | length 476.2
  Top Layer w15: 1027.98,-3004.5 U10.21@1027.98,-2943.28
  Top Layer w20: C82.2@969.48,-3088 969.48,-3063 1027.98,-3004.5
  Top Layer w40: L10.1@729.48,-3223 774.48,-3223 849.48,-3148 949.48,-3148 964.48,-3133 C82.2@964.48,-3098
NetC85_2: C85.2 R46.1 | length 57
  Top Layer w15: C85.2@1434.48,-2625 1434.48,-2623 R46.1@1434.48,-2568
NetD2_K: D2.K F1.1
NetD3_A: D3.A R9.1 | length 60
  Top Layer w15: D3.A@4645.48,-1357 R9.1@4705.48,-1357
NetD5_A: D5.A R29.1 | length 51
  Top Layer w15: D5.A@2212.48,-2987 R29.1@2263.48,-2987
NetD6_2: D6.2 J4.1 R32.1 | length 323.5
  Top Layer w12: R32.1@4918.57,-364.91 D6.2@4972.57,-364.91 4972.57,-315.91 4993.48,-295 4993.48,-190 4933.37,-129.89 J4.1@4933.37,-129
NetD8_A: D8.A R3.2 | length 65
  Top Layer w15: D8.A@5550.48,-1598 R3.2@5550.48,-1533
NetD10_3: D10.3 R116.2 U25.6 | length 281
  Top Layer w12: U25.6@2372.48,-1129 D10.3@2653.48,-1129
NetD11_A: D11.A L6.2 U9.18 | length 277.9
  Top Layer w15: 148.3,-3745.36 U9.18@148.3,-3698
  Top Layer w25: 148.3,-3745.36 148.3,-3761.82 159.48,-3773 249.48,-3773 279.48,-3743 279.48,-3714.26 D11.A@305.74,-3688
NetD34_2: D34.2 J4.3 R55.1 | length 334.5
  Top Layer w12: J4.3@5169.59,-129 5187.48,-129 5247.57,-189.09 D34.2@5247.57,-364.91 ; D34.2@5247.66,-365 R55.1@5303.48,-365
NetD35_2: D35.2 J4.2 R54.2 | length 330.1
  Top Layer w12: R54.2@5028.57,-364.91 D35.2@5082.57,-364.91 ; J4.2@5051.48,-129 5051.48,-128 5113.48,-190 5113.48,-285 5083.48,-315 D35.2@5083.48,-365
NetD36_2: D36.2 J4.4 R60.2 | length 182.8
  Top Layer w12: J4.4@5169.59,-247.11 5169.59,-266.11 5138.48,-297.22 5138.48,-360 5143.48,-365 R60.2@5193.48,-365
NetD37_2: D37.2 J4.6 R61.2 | length 200.8
  Top Layer w12: R61.2@4808.57,-364.91 D37.2@4862.57,-364.91 ; D37.2@4863.48,-365 4863.48,-317 J4.6@4933.37,-247.11
NetJ5_11: J5.11 R10.1 | length 114
  Top Layer w15: R10.1@3559.48,-4032.07 J5.11@3673.46,-4032.07
NetJ5_12: J5.12 Q1.2 Q2.2 | length 1427.9
  Top Layer w10: 3529.48,-3190.95 Q2.2@3646.9,-3190.95 ; Q1.2@3641.9,-3048 3543.69,-3048 3524.48,-3067.21 3524.48,-3938 3544.48,-3958 3744.48,-3958 3773.46,-3986.98 J5.12@3773.46,-4032.07
NetJ5_14: J5.14 R11.1 | length 113
  Top Layer w15: J5.14@4195.5,-4032.07 R11.1@4308.55,-4032.07
NetJ9_2: J9.2 R33.1 | length 146
  Top Layer w10: R33.1@4347.48,-360 4347.48,-335 4373.98,-308.5 J9.2@4373.98,-225
NetJ9_3: J9.3 R34.1 | length 155.7
  Top Layer w10: R34.1@4292.48,-360 4292.48,-340 4342.48,-290 J9.3@4342.48,-225
NetJ21_20: J21.20 R104.2 | length 190.3
  Top Layer w10: J21.20@792.24,-1846.58 792.24,-1750.24 820.48,-1722 R104.2@820.48,-1668
NetJ21_22: J21.22 R105.2 | length 200.3
  Top Layer w10: J21.22@823.73,-1846.58 823.73,-1753.75 878.48,-1699 R105.2@878.48,-1669
NetP5_1: P5.1 U9.12 | length 471.5
  Top Layer w18: -15.52,-3758 -5.24,-3747.72 U9.12@-5.24,-3698
  Top Layer w25: -15.52,-3758 -15.52,-4053 4.48,-4073 P5.1@88.42,-4073
NetP5_2: P5.2 U9.13 | length 423.6
  Top Layer w18: 20.35,-3763 U9.13@20.35,-3698
  Top Layer w25: 20.35,-3763 20.35,-3908.87 137.63,-4026.15 P5.2@137.63,-4073
NetP5_5: P5.5 U9.14 | length 698.7
  Top Layer w18: v15(45.94,-3753) v15(45.94,-3738) U9.14@45.94,-3698
  Top Layer w30: v1@285.27,-4130.79 P5.5@285.27,-4073
  Bottom Layer w25: 41.48,-3762 41.48,-4080 94.48,-4133 v1(270.48,-4133) v1(287.48,-4133)
NetP5_6: P5.6 U9.15 | length 703.2
  Top Layer w18: v15(71.53,-3755.05) v15(71.53,-3738) U9.15@71.53,-3698
  Top Layer w25: P5.6@336.48,-4071 v1(382.48,-4071)
  Bottom Layer w25: 77.48,-3763 77.48,-4049 99.48,-4071 v1(382.48,-4071)
  other v1: 364.48,-4071
NetQ1_1: Q1.1 R13.1 | length 76.2
  Top Layer w10: Q1.1@3648.3,-3118 R13.1@3724.48,-3118
NetQ2_1: Q2.1 R14.1 | length 71.2
  Top Layer w10: Q2.1@3653.3,-3263 R14.1@3724.48,-3263
NetR1_2: R1.2 R2.1 U1.5 | length 225.3
  Top Layer w10: R2.1@4677.48,-1900 R1.2@4735.48,-1900 4783.48,-1852 4830.48,-1852 4848.48,-1834 U1.5@4848.48,-1807
NetR4_2: R4.2 U2.5 | length 120.6
  Top Layer w12: U2.5@5339.57,-1372 5371.48,-1372 5416.48,-1327 R4.2@5441.48,-1327
NetR7_2: R7.2 U7.4 | length 86
  Top Layer w12: R7.2@4520,-2820 U7.4@4606,-2820
NetR8_2: R8.2 U7.8 | length 142.1
  Top Layer w12: R8.2@4751,-2606 4824,-2606 4834,-2616 U7.8@4834,-2671
NetR19_1: R19.1 U6.27 | length 244.2
  Top Layer w8: R19.1@2458.48,-2983.32 2458.48,-3083 2512.34,-3136.86 U6.27@2580.74,-3136.86
NetR20_2: R20.2 U6.13 | length 167.7
  Top Layer w12: U6.13@2769.72,-3266.78 2863.26,-3266.78 2894.52,-3298.04 R20.2@2924.48,-3298.04
NetR21_2: R21.2 U6.17 | length 156.8
  Top Layer w10: U6.17@2769.72,-3188.04 R21.2@2926.52,-3188.04
NetR22_2: R22.2 U6.19 | length 249.5
  Top Layer w12: U6.19@2740.48,-3136.86 2815.62,-3136.86 2888.48,-3064 R22.2@2888.48,-2992.68
NetR23_2: R23.2 U6.21 | length 250.7
  Top Layer w10: U6.21@2698.85,-3136.86 2698.85,-3109.63 2717.48,-3091 2787.48,-3091 2838.48,-3040 R23.2@2838.48,-2985
NetR25_1: R25.1 U6.25 | length 155
  Top Layer w8: U6.25@2620.48,-3142 R25.1@2620.48,-2987
NetR26_1: R26.1 U6.24 | length 164
  Top Layer w8: U6.24@2639.8,-3136.86 2638.48,-3135.54 2638.48,-3084 2678.48,-3044 R26.1@2678.48,-2990
NetR27_1: R27.1 U6.22 | length 227.3
  Top Layer w8: U6.22@2679.17,-3136.86 2679.48,-3136.54 2679.48,-3104 2712.48,-3071 2767.48,-3071 2783.48,-3055 R27.1@2783.48,-2985
NetR28_2: R28.2 U6.35 | length 204.2
  Top Layer w8: R28.2@2371.48,-3370 2460.08,-3370 2523.76,-3306.32 2549.07,-3306.32 U6.35@2549.24,-3306.15
NetR29_2: R29.2 R30.1 U6.28 | length 365.3
  Top Layer w10: R29.2@2332.48,-2988 2332.48,-3114 v1(2344.48,-3126) ; v1(2462.48,-3126) 2463.48,-3126 2505.83,-3168.35 U6.28@2549.24,-3168.35
  Bottom Layer w10: v1(2344.48,-3126) v1(2462.48,-3126)
NetR39_2: R39.2 U9.3 | length 230.4
  Top Layer w8: U9.3@152.02,-3464.28 148.3,-3460.57 148.3,-3244.18 R39.2@154.48,-3238
NetR40_1: R40.1 R41.1 U9.7 | length 245
  Top Layer w8: R40.1@4.48,-3238 4.48,-3263 45.94,-3304.46 45.94,-3460.57 U9.7@42.22,-3464.28
NetR41_2: R41.2 R42.1 R44.1 U9.4 | length 284.6
  Top Layer w8: R44.1@54.48,-3238 R42.1@104.48,-3238 ; R42.1@99.48,-3243 R41.2@99.48,-3328 99.48,-3363 122.71,-3386.23 U9.4@122.71,-3468
NetR43_1: R43.1 U9.10 | length 236.1
  Top Layer w10: R43.1@-45.52,-3238 -45.52,-3303 -30.83,-3317.69 U9.10@-30.83,-3468
NetR45_2: R45.2 U10.2 U10.3 | length 90
  Top Layer w18: 1270.89,-2644 R45.2@1270.89,-2554
NetR46_2: R46.2 R47.2 | length 49
  Top Layer w15: R46.2@1494.48,-2567 R47.2@1494.48,-2518
NetR51_2: R51.2 R52.2 | length 56
  Top Layer w15: R51.2@679.48,-2579 679.48,-2573 R52.2@679.48,-2523
NetR56_2: R56.2 U10.12 | length 311.8
  Top Layer w8: R56.2@849.48,-2498 849.48,-2538 864.48,-2553 1014.48,-2553 1027.98,-2566.5 U10.12@1027.98,-2648
NetR58_2: R58.2 R59.2 U2.4 | length 169.5
  Top Layer w12: U2.4@5339.57,-1409.4 5382.08,-1409.4 5412.48,-1379 R59.2@5440.48,-1379 R58.2@5440.48,-1435
NetR114_1: R114.1 U25.12 | length 131.5
  Top Layer w8: R114.1@1952.48,-1274 R114.1@1957.48,-1279
  Top Layer w12: R114.1@1957.48,-1279 U25.12@2081.89,-1279
NetR115_1: R115.1 U25.10 | length 129.4
  Top Layer w12: R115.1@1952.48,-1179 U25.10@2081.89,-1179
NetR116_1: R116.1 U25.5 | length 135
  Top Layer w12: U25.5@2357.48,-1179 R116.1@2492.48,-1179
NRST_E: D33.2 J2.95 K1.3 K1.4 P9.1 | length 2227.2
  Top Layer w10: J2.95@4284.48,-899 4284.48,-926 4296.48,-938 v1(4301.48,-938) ; v4(4579.8,-940.97) 4921.52,-940.97 4922.5,-940 K1.3@4928.48,-940 ; K1.3@4922.5,-939.06 4922.5,-1169.02 4953.48,-1200 5573.48,-1200 5598.48,-1225 5598.48,-1630.48 5619,-1651 5799.48,-1651 P9.1@5808.48,-1660
  Bottom Layer w10: v1@4302.48,-939 v4@4574.8,-939
ONOFF: J2.96
PCIE_RX_N: C116.1 J2.75 | length 3998.2
  Top Layer w7: C116.1@709.48,-1608 709.48,-1589 728.98,-1569.5 728.98,-1501.37 748.35,-1482 3885.48,-1482 3929.48,-1438 3929.48,-1133 3919.48,-1123 3829.48,-1123 v1(3789.48,-1083) ; v1(3791.48,-931) J2.75@3791.48,-890
  Bottom Layer w7: v1(3789.48,-1083) v1@3789.48,-933
PCIE_RX_P: C117.1 J2.73 | length 4052.9
  Top Layer w7: C117.1@764.48,-1608 764.48,-1589 744.98,-1569.5 744.98,-1508 754.98,-1498 3892.11,-1498 3945.48,-1444.63 3945.48,-1126.37 3926.11,-1107 3848.48,-1107 3794.48,-1053 v1(3744.48,-1053) ; v1@3745.48,-927 v1(3745.48,-926) J2.73@3745.48,-886
  Bottom Layer w7: v1(3744.48,-1053) 3744.48,-1040 3745.48,-1039 v1(3745.48,-926)
PCIE_RXO_N: C116.2 J21.23 | length 554.4
  Top Layer w8: C116.2@707.48,-1673 707.48,-1734 682.48,-1759 682.48,-1954 839.48,-2111 J21.23@839.48,-2152